# EAGLE board LedHolder (EAGLE 7.5.0)
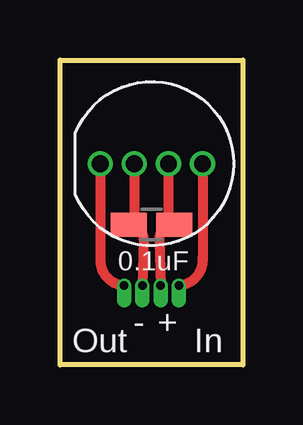
[diagram p0: board, top side]
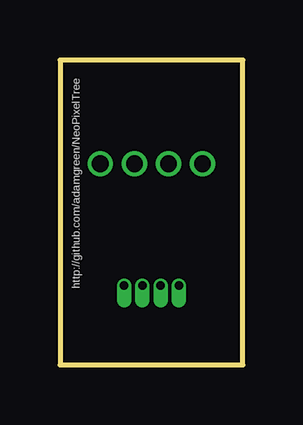
[diagram p1: board, bottom side, seen from below]

Size 7.62 x 12.7 mm. Coordinates in mm from the lower left corner, seen from the top.
Outline: 0,0 0,12.7 7.62,12.7 7.62,0 0,0
Copper layers (1*16): Top 0.035559375mm / dielectric 1.6mm / Bottom 0.035559375mm
Design rules "oshpark-2layer": minimum track width 6mil, minimum drill 10mil, track to track 6mil, track to pad 6mil, pad to pad 6mil, via to via 6mil, smd to smd 6mil, copper to edge 15mil, drill to drill 6mil, minimum pad ring 5mil, minimum via ring 5mil, stop-mask expansion 2.5mil, vias tented up to drill 0mil, thermal gap 10mil

## Footprints (pad centres in the part's own frame; a part is rotated, then mirrored left to right if it is on the bottom)
NEOPIXEL_5MM_TH = drill 0.7: 5V -0.71,0; DATA_IN -2.13,0; DATA_OUT 2.13,0; GROUND 0.71,0
NEOPIXEL_BRANCH_4WIRE = drill 0.356 pad 0.61 offset: P$1 -0.381,0; P$2 0.381,0; P$3 -1.143,0; P$4 1.143,0
R0805W = smd 1.5 x 1: 1 -0.94,0; 2 0.94,0

## Placement (x,y rotation side)
E$1  [NEOPIXEL_5MM_TH]  3.81,8.38 180 top
E$2  [NEOPIXEL_BRANCH_4WIRE]  3.81,3.3 0 top
E$3  0.1uF  [R0805W]  3.81,5.84 0 top

## Library data of the parts
E$1 E$2 = adam_custom
E$3 = adafruit

## Nets
S$1: E$1.GROUND E$2.P$1 E$3.1
S$2: E$1.5V E$2.P$2 E$3.2
S$3: E$1.DATA_OUT E$2.P$3
S$4: E$1.DATA_IN E$2.P$4

## Tracks (layer width: path | path; a pad name or v marks a point on that pad's centre or on a via)
S$1
  Top 0.406: E$1.GROUND 3.1,6.07 arc-90 E$3.1 arc-90 3.48,5.23 E$2.P$1
S$2
  Top 0.406: E$1.5V 4.52,6.07 arc90 E$3.2 arc90 4.14,5.23 E$2.P$2
S$3
  Top 0.406: E$1.DATA_OUT 1.68,4.44 arc90 E$2.P$3
S$4
  Top 0.406: E$1.DATA_IN 5.94,4.44 arc-90 E$2.P$4

## Text on the board
tPlace: Out | - | + | In
bPlace: http://github.com/adamgreen/NeoPixelTree